# EAGLE board 1s (EAGLE 9.1.1)
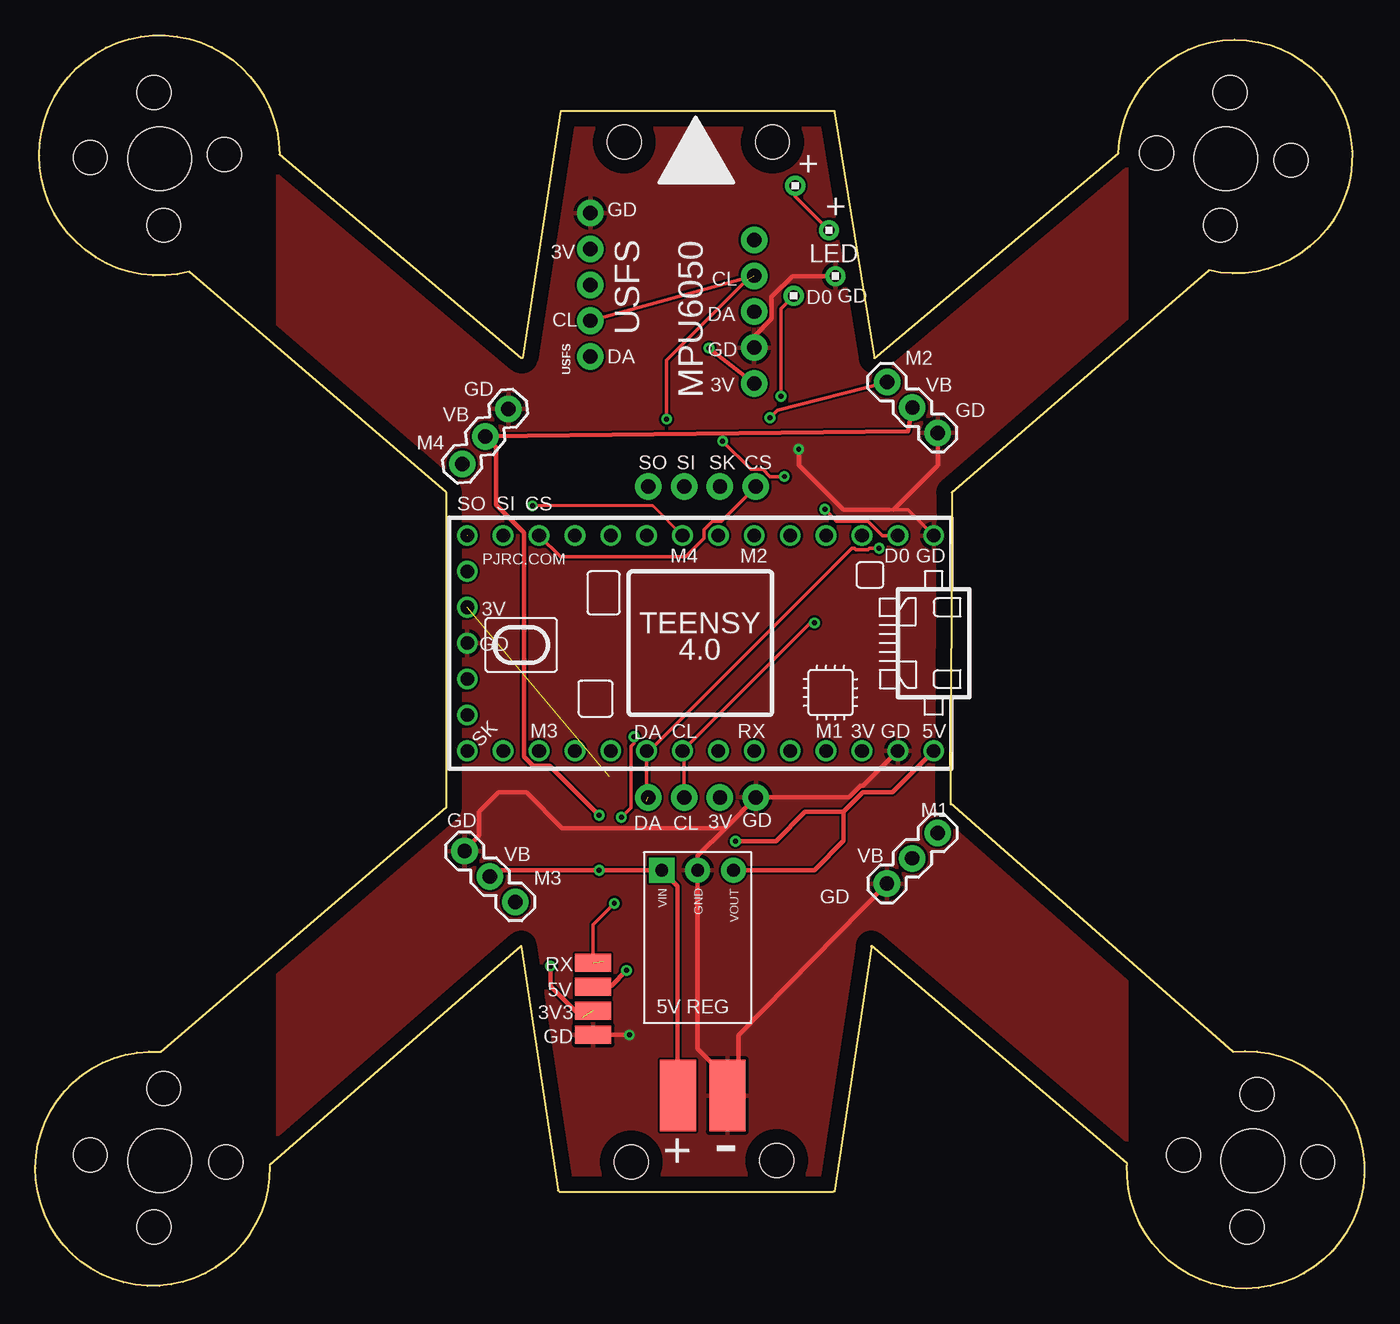
[diagram p0: board, top side]
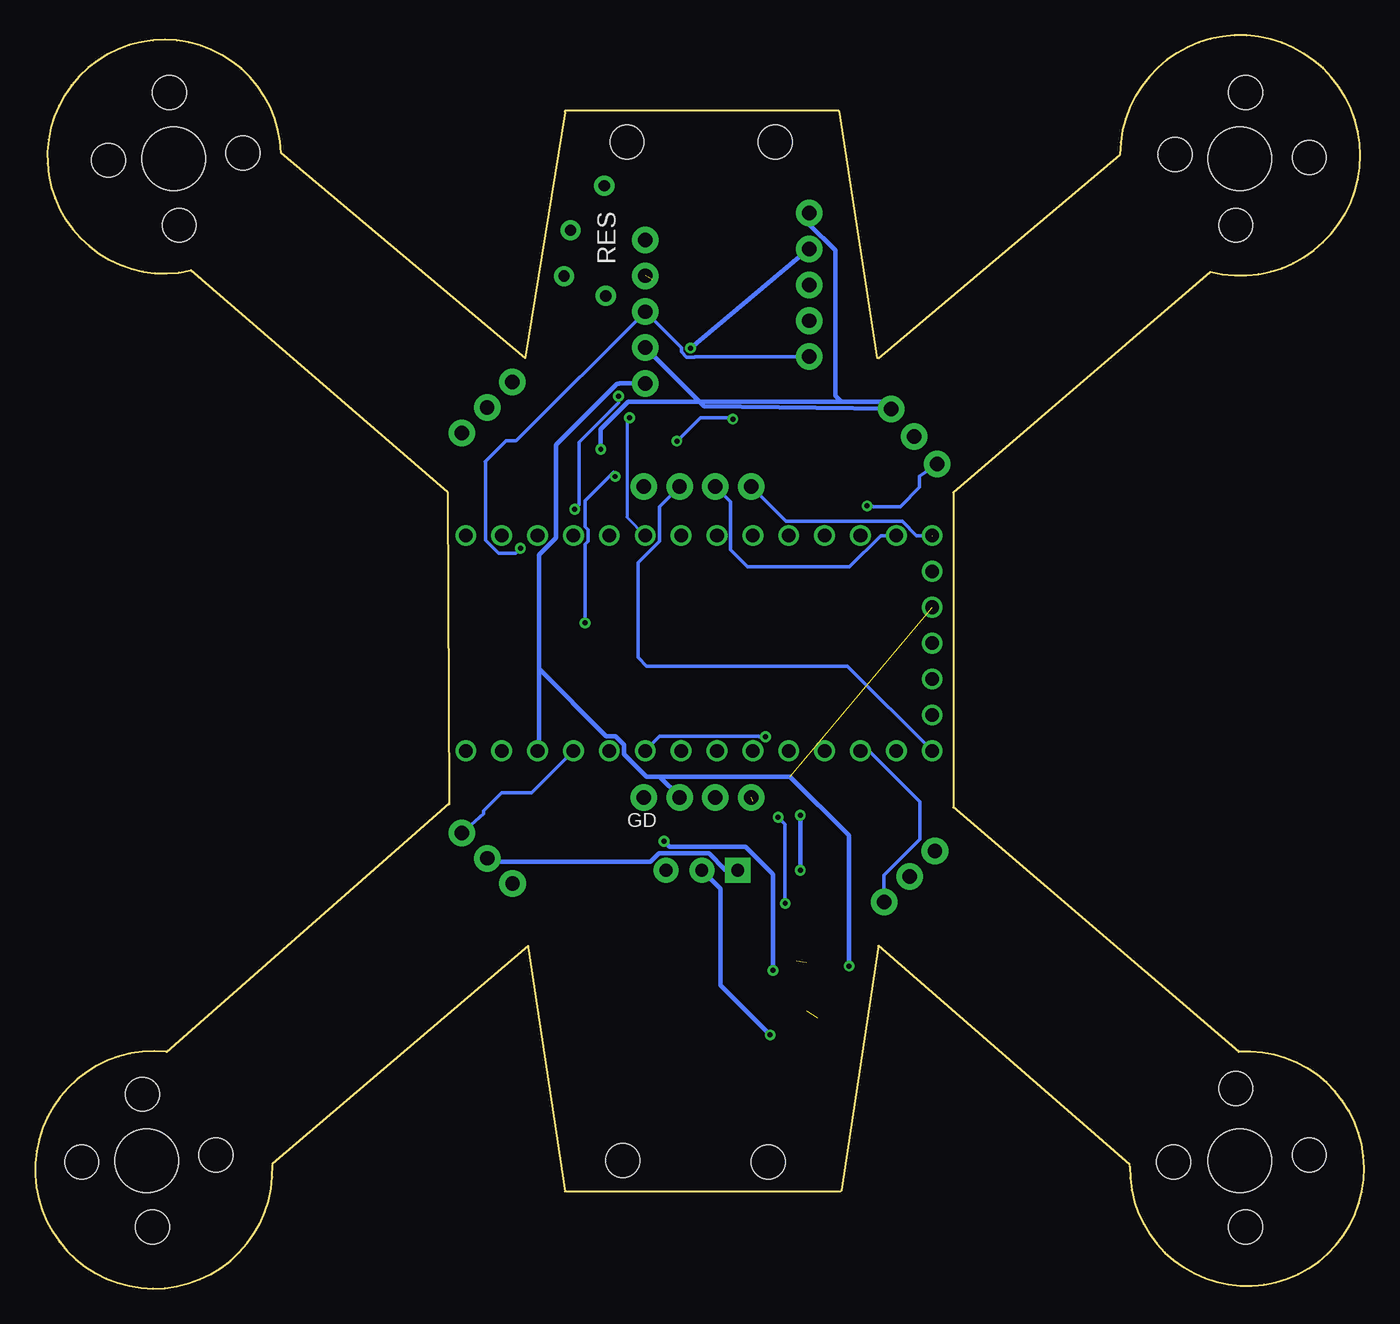
[diagram p1: board, bottom side, seen from below]

Size 94.08 x 88.7 mm. Coordinates in mm from the lower left corner, seen from the top.
Outline: 64.79,34.26 64.89,56.36 83.09,72.06 arc281 76.69,80.36 59.39,65.86 56.59,83.26
Outline: 56.59,83.36 37.19,83.36 34.49,65.86
Outline: 37.09,6.86 56.49,6.86
Outline: 36.99,6.96 34.39,24.26 16.59,8.76
Outline: 59.19,24.16 56.59,6.86
Outline: 64.79,34.36 84.79,16.76 arc-279 77.29,8.76
Outline: 77.29,8.86 59.19,24.26
Outline: 34.39,65.86 17.29,80.26 arc284 10.89,71.96 29.09,56.36 29.09,34.06 8.89,16.76 arc275 16.59,8.66
Copper layers (1*16): Top 0.035mm / dielectric 1.5mm / Bottom 0.035mm
Design rules "default": minimum track width 6mil, minimum drill 0.35mm, track to track 6mil, track to pad 6mil, pad to pad 6mil, via to via 6mil, smd to smd 6mil, copper to edge 40mil, drill to drill 6mil, minimum pad ring 10mil, minimum via ring 8mil, stop-mask expansion 4mil, vias tented up to drill 0mil, thermal gap 10mil
Holes 2.4 mm at 41.69,81.16 52.19,81.16 42.19,8.96 52.49,9.06 84.59,84.66 83.89,75.26 79.39,80.36 88.89,79.86 8.39,84.66 9.09,75.26 3.89,80.06 13.39,80.26 86.49,13.76 85.79,4.36 81.29,9.46 90.79,8.96 9.09,14.16 8.39,4.36 3.89,9.46 13.49,8.96
Holes 4.5 mm at 84.29,79.96 8.79,79.96 86.19,9.06 8.79,9.06

## Footprints (pad centres in the part's own frame; a part is rotated, then mirrored left to right if it is on the bottom)
SMD1,27-2,54 = smd 1.27 x 2.54: 1 0,0
SMD2,54-5,08 = smd 2.54 x 5.08: 1 0,0
1X03 = drill 1.016 pad 1.88: 1 0,0; 2 2.54,0; 3 5.08,0
1X04_NO_SILK = drill 1.016 pad 1.88: 1 0,0; 2 2.54,0; 3 5.08,0; 4 7.62,0
5V_VOLTAGE_REGULATOR = drill 0.9 pad 1.778: GND 0,-6.35; VOUT -2.54,-6.35 | drill 0.9 pad 1.778 square: VIN 2.54,-6.35
1X05_NO_SILK = drill 1.016 pad 1.88: 1 0,0; 2 2.54,0; 3 5.08,0; 4 7.62,0; 5 10.16,0
TEENSY_4.0 = drill 0.965: 0/RX -13.97,-7.62; 1/TX -11.43,-7.62; 2 -8.89,-7.62; 3/CANTX -6.35,-7.62; 3V3_LN 16.51,-2.54; 3V3_LO -11.43,7.62; 4/CANRX -3.81,-7.62; 5 -1.27,-7.62; 6 1.27,-7.62; 7 3.81,-7.62; 8 6.35,-7.62; 9/CS 8.89,-7.62; 10/CS 11.43,-7.62; 11/MOSI 13.97,-7.62; 12/MISO 16.51,-7.62; 13/SCK 16.51,7.62; 14/A0 13.97,7.62; 15/A1 11.43,7.62; 16/A2 8.89,7.62; 17/A3 6.35,7.62; 18/A4/SDA 3.81,7.62; 19/A5/SCL 1.27,7.62; 20/A6 -1.27,7.62; 21/A7 -3.81,7.62; 22/A8 -6.35,7.62; 23/A9 -8.89,7.62; GND -16.51,-7.62; GND2 -13.97,7.62; GND3 16.51,0; ON/OFF 16.51,5.08; PROG 16.51,2.54; VBAT\ 16.51,-5.08; VIN -16.51,7.62
1X1 = drill 0.8 pad 1.422: 1 0,0

## Placement (x,y rotation side)
3V3  [SMD1,27-2,54]  39.49,19.66 90 top
5V  [SMD1,27-2,54]  39.49,21.36 90 top
+  [SMD2,54-5,08]  45.5,13.66 0 top
-  [SMD2,54-5,08]  48.99,13.66 0 top
ESC1  455-1750-1-ND  [1X03]  60.29,28.66 45 top
ESC2  455-1750-1-ND  [1X03]  63.89,60.56 135 top
ESC3  455-1750-1-ND  [1X03]  30.39,30.96 315 top
ESC4  455-1750-1-ND  [1X03]  33.49,62.26 230 top
GD  [SMD1,27-2,54]  39.49,17.96 90 top
J1  [1X04_NO_SILK]  43.39,34.76 0 top
J2  [1X04_NO_SILK]  43.39,56.76 0 top
J_REG_5V_1  5V_VOLTAGE_REGULATOR  [5V_VOLTAGE_REGULATOR]  46.89,23.26 180 top
MPU6050  [1X05_NO_SILK]  50.89,64.06 90 top
RX  [SMD1,27-2,54]  39.49,23.06 90 top
U$1  TEENSY_4.0  [TEENSY_4.0]  47.09,45.68 180 top
U$3  1X1  [1X1]  53.69,70.26 0 top
U$4  1X1  [1X1]  53.8,78.05 0 top
U$6  1X1  [1X1]  56.19,74.91 0 top
U$7  1X1  [1X1]  56.64,71.66 0 top
USFS  [1X05_NO_SILK]  39.29,65.96 90 top

## Library data of the parts
3V3 5V + - GD RX = wirepad
ESC1-ESC4 = SparkFun-Connectors; PROD_ID: XXX-00000
J1 J2 = SparkFun-Connectors; PROD_ID: CONN-09696
J_REG_5V_1 = Pololu Voltage Regulators
MPU6050 USFS = SparkFun-Connectors
U$1 = TEENSY 4.0
U$3 U$4 U$6 U$7 = headers(2mm)

## Nets
3V3: 3V3.1 J1.3 MPU6050.1 U$1.3V3_LN U$1.3V3_LO USFS.4
5V: 5V.1 J_REG_5V_1.VOUT U$1.VIN
CS: J2.4 U$1.10/CS
GND: -.1 ESC1.1 ESC2.1 ESC3.1 ESC4.1 GD.1 J1.4 J_REG_5V_1.GND MPU6050.2 U$1.GND U$1.GND2 U$1.GND3 U$7.1 USFS.5
LED_R_IN: U$1.0/RX U$3.1
LED_R_OUT: U$4.1 U$6.1
M1: ESC1.3 U$1.23/A9
M2: ESC2.3 U$1.4/CANRX
M3: ESC3.3 U$1.15/A1
M4: ESC4.3 U$1.6
MISO: J2.1 U$1.12/MISO
MOSI: J2.2 U$1.11/MOSI
RX: RX.1 U$1.21/A7
SCK: J2.3 U$1.13/SCK
SCL: J1.2 MPU6050.4 U$1.19/A5/SCL USFS.2
SDA: J1.1 MPU6050.3 U$1.18/A4/SDA USFS.1
VBAT: +.1 ESC1.2 ESC2.2 ESC3.2 ESC4.2 J_REG_5V_1.VIN

## Tracks (layer width: path | path; a pad name or v marks a point on that pad's centre or on a via)
3V3  (via drill 0.35)  (2 unrouted)
  Top 0.305: v36.47,22.83 36.47,21.4 38.71,19.17 | MPU6050.1 v47.69,66.56
  Bottom 0.305: U$1.3V3_LO 58.42,37.96 58.42,43.85 | v36.47,22.83 36.47,32.07 40.64,36.24 49.88,36.24 | J1.3 48.47,34.83 49.88,36.24 | MPU6050.1 52.72,64.06 52.75,64.03 52.91,64.03 57.22,59.72 57.22,53.12 58.42,51.92 58.42,44.46 58.42,43.85 | 58.42,43.85 53.67,39.1 53.01,39.1 52.4,38.49 52.4,37.83 50.81,36.24 49.88,36.24 | v47.69,66.56 USFS.4
5V  (via drill 0.35)
  Top 0.305: 39.59,21.46 39.58,21.45 | 39.58,21.45 5V.1 | J_REG_5V_1.VOUT 55.15,29.61 57.22,31.68 57.22,33.74 | 57.22,33.74 58.61,35.13 60.67,35.13 U$1.VIN | 57.22,33.74 54.49,33.74 52.42,31.67 v49.58,31.67 | v41.86,22.52 40.78,21.45 39.58,21.45
  Bottom 0.305: v49.58,31.67 49.17,31.26 43.79,31.26 41.86,29.32 v41.86,22.52
CS
  Top 0.254: J2.4 48.57,54.31 47.94,54.31 47.35,53.72 47.35,53.09 46.04,51.78 37.18,51.78 U$1.10/CS
GND  (via drill 0.35)
  Top 0.254: U$1.GND 61.76,55.14 60.77,55.14 60.47,55.14
  Top 0.305: 38.86,17.96 GD.1 v42.06,17.95 | 49.48,14.39 46.89,16.98 J_REG_5V_1.GND 46.89,30.64 48.85,32.6 | 48.85,32.6 J1.4 57.6,34.76 58.42,35.58 58.59,35.58 U$1.GND2 | ESC1.1 49.78,17.95 49.78,14.9 | ESC3.1 31.42,32.09 31.42,33.74 32.81,35.13 34.77,35.13 37.3,32.6 48.85,32.6 | 60.77,55.14 63.89,58.26 ESC2.1 | 60.47,55.14 57.2,55.14 54.05,58.28 v54.05,59.4 54.05,59.5 | 50.89,67.31 50.89,66.66 | 50.89,66.66 MPU6050.2 | U$7.1 53.59,71.66 52.14,70.2 52.14,68.62 50.89,67.38 50.89,66.66
  Bottom 0.305: v42.06,17.95 45.57,21.46 45.57,28.29 J_REG_5V_1.GND | 36.99,62.76 52.11,62.76 54.05,60.82 v54.05,59.4 | 36.99,62.76 33.99,62.76 ESC4.1 46.75,62.46 MPU6050.2 | USFS.5 39.29,75.34 37.45,73.49 37.45,63.21 37.39,63.16 36.99,62.76
  pour Top: 77.24,83.51 77.24,6.71 17.19,6.71 17.19,83.51
LED_R_IN  (via drill 0.35)
  Top 0.254: U$1.0/RX 59.96,53.3 58.94,54.31 56.74,54.31 v55.89,55.16 | v52.79,63.16 52.79,69.36 U$3.1
  Bottom 0.254: v55.89,55.16 55.57,55.48 55.57,59.91 52.79,62.69 v52.79,63.16
LED_R_OUT
  Top 0.254: U$4.1 53.8,77.3 U$6.1
M1
  Bottom 0.254: U$1.23/A9 58.94,35.1 61.06,35.1 62.33,33.83 62.33,33.65 62.33,33.6 ESC1.3
M2  (via drill 0.35)
  Top 0.254: ESC2.3 52.53,62.15 v52.02,61.64
  Bottom 0.203: U$1.4/CANRX 52.21,54.6 52.21,61.45 v52.02,61.64
M3
  Bottom 0.254: U$1.15/A1 35.07,38.06 31.45,34.44 31.45,31.79 33.98,29.25 ESC3.3
M4  (via drill 0.35)
  Top 0.203: U$1.6 43.73,55.39 v35.2,55.39
  Bottom 0.203: v35.2,55.39 34.81,55.39 34.75,55.34
  Bottom 0.254: 34.75,55.34 32.83,55.34 31.47,56.7 31.47,57.49 ESC4.3
MISO  (1 unrouted)
  Bottom 0.254: J2.1 40.95,54.31 32.7,54.31 31.68,53.3 30.61,53.3
MOSI
  Bottom 0.254: J2.2 44.86,55.68 44.86,52.28 43.66,51.08 36.44,51.08 34.22,53.3 U$1.11/MOSI
RX  (via drill 0.35)  (1 unrouted)
  Top 0.254: 40.29,23.06 40.19,23.16 | v42.39,39.06 42.39,38.6 42.17,38.39 42.17,34.04 v41.49,33.36 | v40.99,27.26 39.49,25.76 RX.1
  Bottom 0.254: v42.39,39.06 42.84,39.06 42.86,39.07 49.89,39.07 U$1.21/A7 | v41.49,33.36 40.99,32.86 v40.99,27.26
SCK
  Bottom 0.254: U$1.13/SCK 36.58,44.06 50.8,44.06 51.41,44.67 51.41,51.36 49.89,52.88 49.89,55.34 J2.3
SCL  (via drill 0.35)  (1 unrouted)
  Top 0.254: J1.2 45.93,37.95 U$1.19/A5/SCL 54.87,47.11 v55.17,47.11 | v53.03,57.47 52.02,57.47 51.52,57.98 50.66,57.98 v48.66,59.98 | v44.7,61.54 44.7,65.7 50.39,71.39 | MPU6050.4 USFS.2
  Bottom 0.254: v55.17,47.11 55.17,52.68 54.97,52.88 54.97,53.72 55.17,53.92 55.17,55.74 53.13,57.78 53.03,57.68 v53.03,57.47 | v48.66,59.98 47,61.64 44.7,61.64 v44.7,61.54
SDA  (via drill 0.35)  (1 unrouted)
  Top 0.254: U$1.18/A4/SDA 43.28,37.86 | 43.28,37.86 43.28,34.51 43.58,34.21 | 43.28,37.86 57.81,52.39 57.99,52.39 58.1,52.28 58.94,52.28 59.05,52.39 v59.74,52.39
  Bottom 0.254: 62.2,58.56 60.76,60 60.03,60 MPU6050.3 48.35,66.6 48.35,66.29 47.96,65.9 47.42,65.9 47.36,65.96 USFS.1 | 62.2,58.56 62.23,58.53 | 62.2,58.56 62.2,52.96 61.29,52.06 60.07,52.06 v59.74,52.39
VBAT  (via drill 0.35)
  Top 0.305: ESC3.2 32.53,29.61 v39.93,29.61 J_REG_5V_1.VIN 45.47,28.49 45.47,14.91 45.5,14.88 +.1 | v39.93,33.49 36.4,37.02 35.23,37.02 34.62,37.63 34.62,53.48 32.62,55.48 32.62,59.55 ESC4.2 61.79,60.66 ESC2.2
  Bottom 0.305: J_REG_5V_1.VIN 45.2,29.61 46.4,30.8 49.93,30.8 50.51,30.22 62.05,30.22 ESC1.2 | v39.93,33.49 v39.93,29.61

## Text on the board
tNames: + | GD | + | USFS | MPU6050 | 3V | LED | CL | D0 | GD | CL | DA | GD | DA | M2 | GD | 3V | VB | GD | VB | M4 | SO | SI | SK | CS | SO | SI | CS | M4 | M2 | D0 | GD | 3V | GD | DA | CL | RX | 3V | GD | 5V | M3 | M1 | SK | GD | GD | DA | CL | 3V | M1 | VB | VB | M3 | GD | + | -
bNames: RES | GD